# EAGLE board Qwiic GPS-RTK2 - ublox ZED-F9P-Panel (EAGLE 9.5.1), part 1 of 3
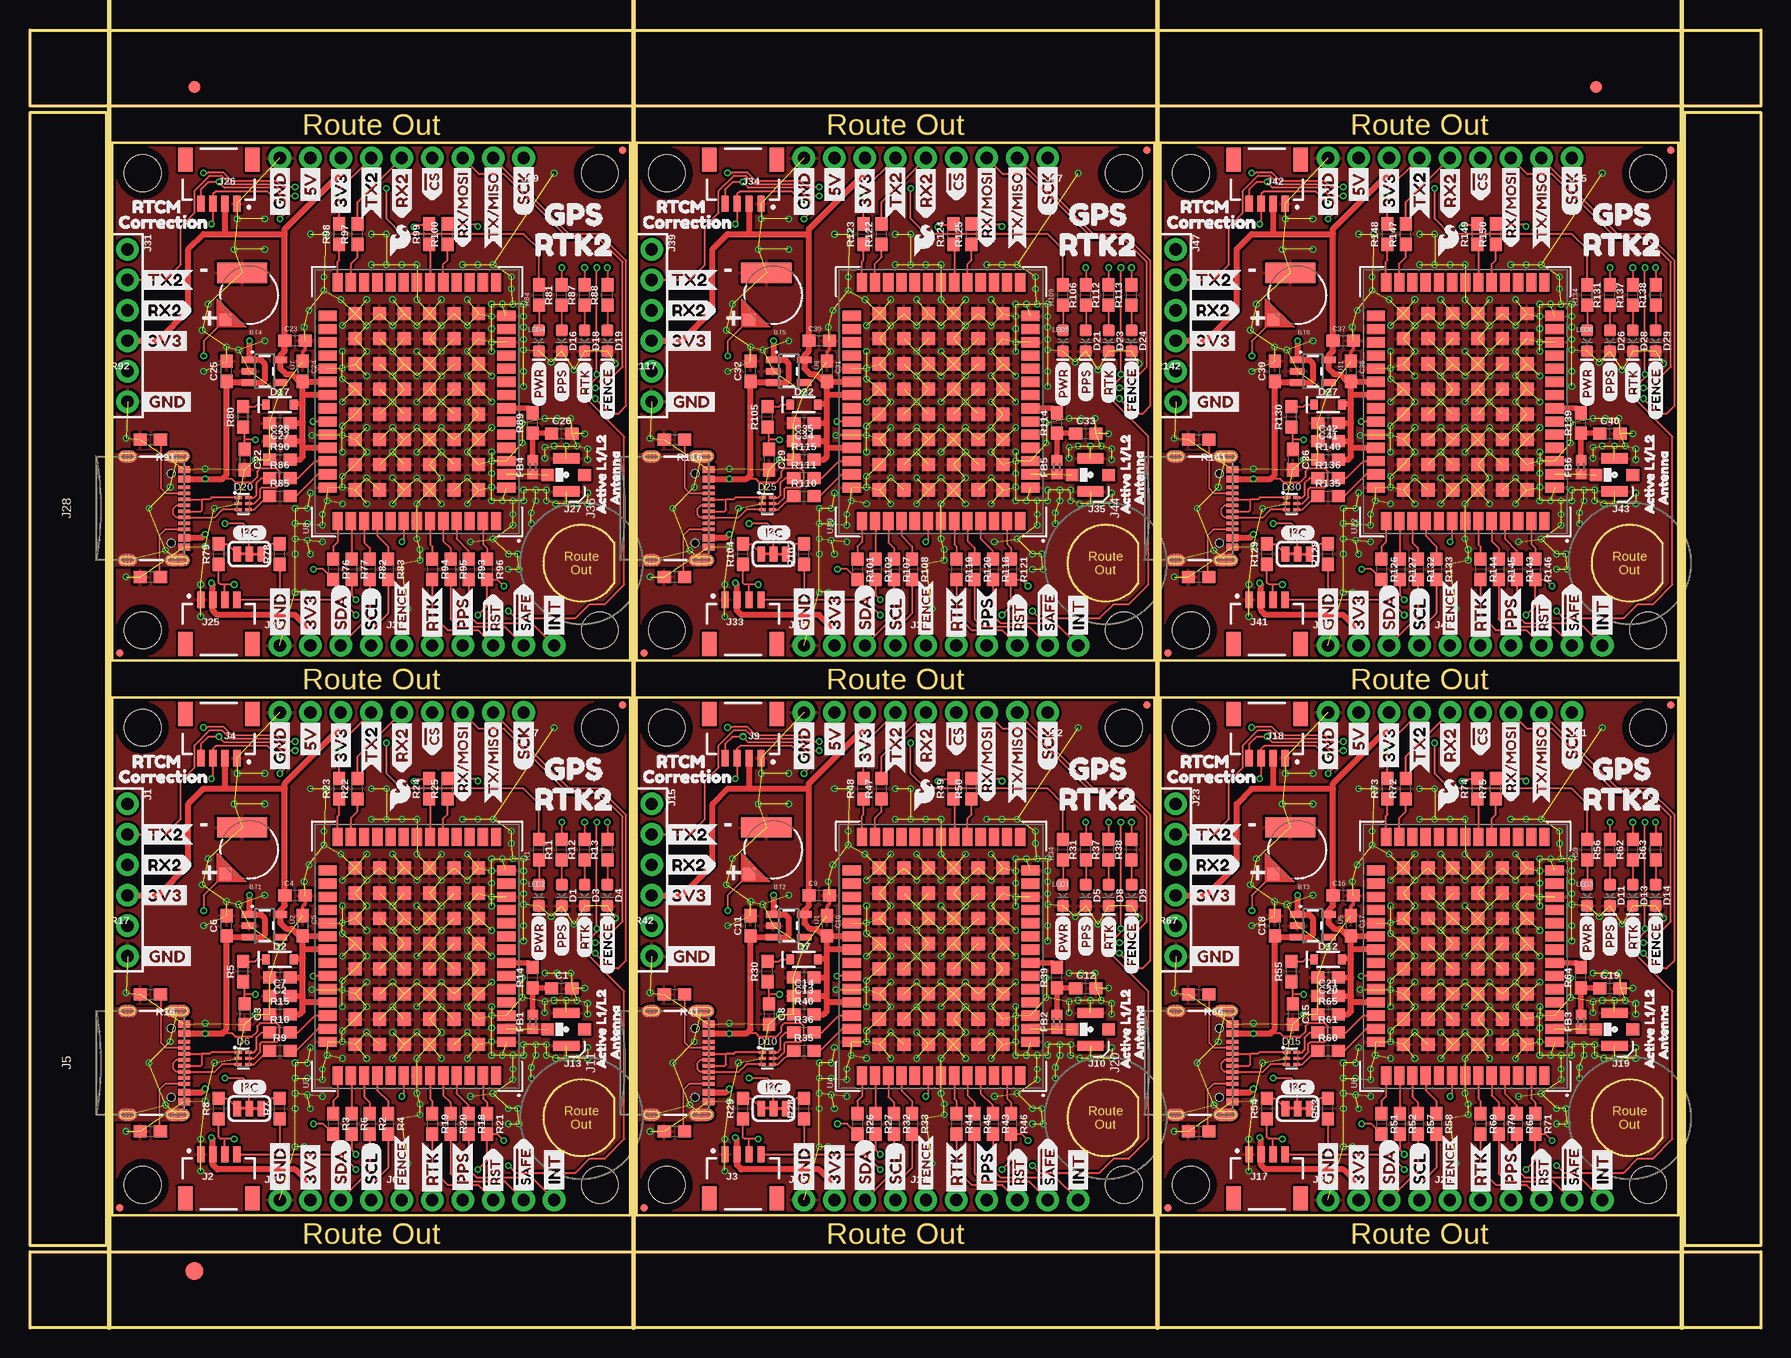
[diagram p0: board, top side]
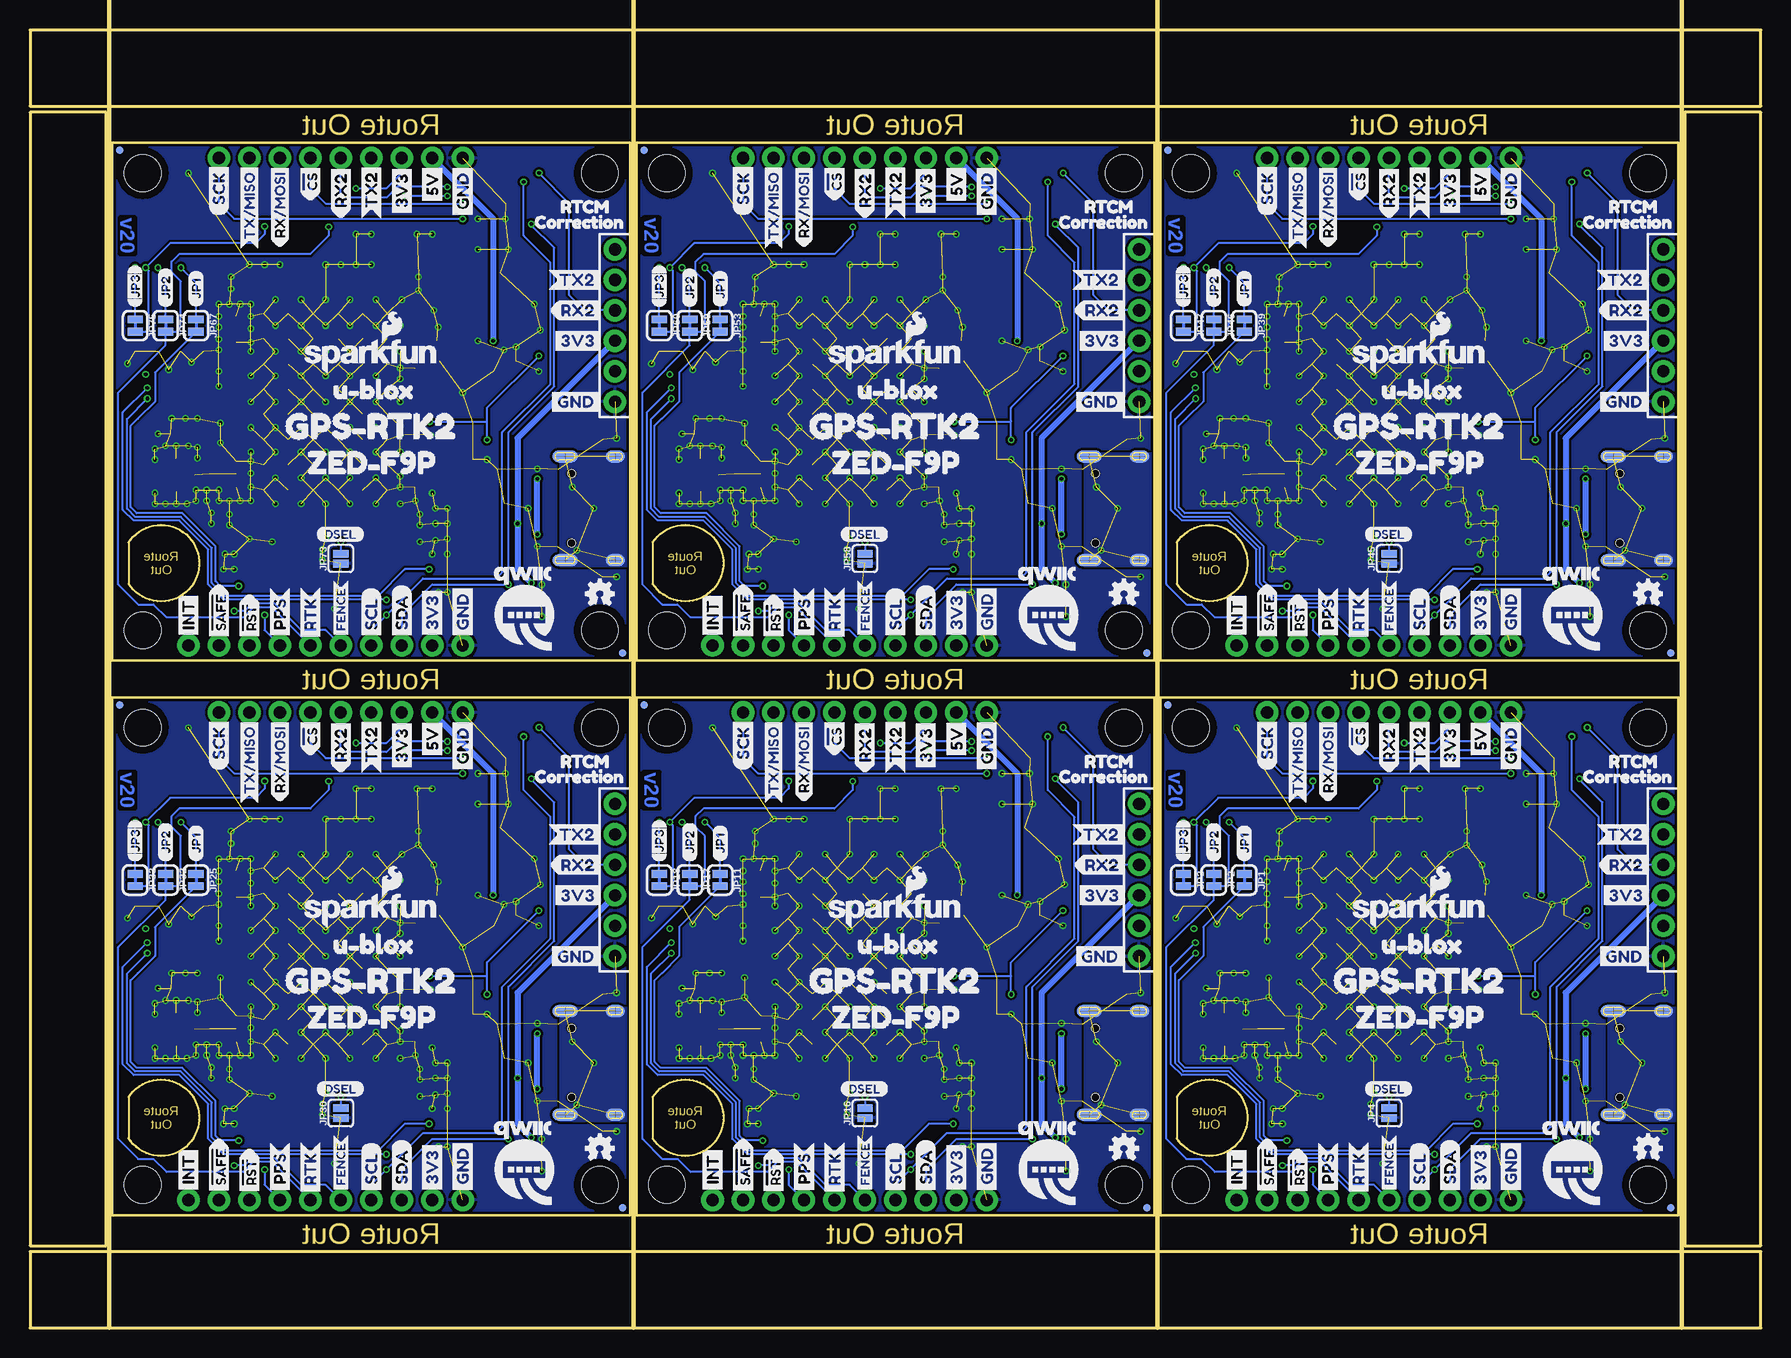
[diagram p1: board, bottom side, seen from below]

Size 144.27 x 108.2 mm. Coordinates in mm from the lower left corner, seen from the top.
Outline: 50.04,9.4 6.86,9.4 6.86,52.58 50.04,52.58 50.04,9.4
Outline: 93.73,9.4 50.55,9.4 50.55,52.58 93.73,52.58 93.73,9.4
Outline: 137.41,9.4 94.23,9.4 94.23,52.58 137.41,52.58 137.41,9.4
Outline: 50.04,55.63 6.86,55.63 6.86,98.81 50.04,98.81 50.04,55.63
Outline: 93.73,55.63 50.55,55.63 50.55,98.81 93.73,98.81 93.73,55.63
Outline: 137.41,55.63 94.23,55.63 94.23,98.81 137.41,98.81 137.41,55.63
Outline: 0,6.35 144.27,6.35 144.27,0 0,0 0,6.35
Outline: 137.92,101.35 144.27,101.35 144.27,6.86 137.92,6.86 137.92,101.35
Outline: 0,108.2 144.27,108.2 144.27,101.85 0,101.85 0,108.2
Outline: 0,101.35 6.35,101.35 6.35,6.86 0,6.86 0,101.35
Copper layers (1*16): Top 0.035mm / dielectric 1.5mm / Bottom 0.035mm
Design rules "SparkFun-2-layer-FAB-LIMIT": minimum track width 4mil, minimum drill 6mil, track to track 4mil, track to pad 4mil, pad to pad 4mil, via to via 4mil, smd to smd 4mil, copper to edge 4mil, drill to drill 4mil, minimum pad ring 5mil, minimum via ring 5mil, stop-mask expansion 4mil, vias tented up to drill 25mil, thermal gap 10mil
Net classes: 2 3.3V: width 0.508 mm
tRestrict: area 44.2,24.1 to 45.6,25.7; area 87.9,24.1 to 89.3,25.7; area 131.6,24.1 to 133,25.7; area 44.2,70.4 to 45.6,71.9; area 87.9,70.4 to 89.3,71.9; area 131.6,70.4 to 133,71.9
Milling: 4 lines

## Footprints (pad centres in the part's own frame; a part is rotated, then mirrored left to right if it is on the bottom)
ML414H_IV01E = smd 1 x 1: + 2.022,2.032 | smd 4.2 x 1.7: - 0.6,-1.85
0603 = smd 1.1 x 1: 1 -0.85,0; 2 0.85,0
LED-0603 = smd 1 x 1: A -0.877,0; C 0.877,0
SOD-323 = smd 0.63 x 0.83: A 1.15,0; C -1.15,0
SOT886 = smd 0.61 x 0.25: 1 -0.405,0.5 | smd 0.56 x 0.25: 2 -0.43,0; 3 -0.43,-0.5; 4 0.43,-0.5; 5 0.43,0; 6 0.43,0.5
FIDUCIAL-1X2 = smd 1 x 1: 1 0,0
FIDUCIAL-1.5X3 = smd 1.5 x 1.5: 1 0,0
0402 = smd 0.85 x 0.9: 1 -0.58,0; 2 0.58,0
1X06_NO_SILK = drill 1.016 pad 1.88: 1 0,0; 2 2.54,0; 3 5.08,0; 4 7.62,0; 5 10.16,0; 6 12.7,0
JST04_1MM_RA = smd 0.6 x 1.35: 1 -1.5,0; 2 -0.5,0; 3 0.5,0; 4 1.5,0 | smd 1.2 x 2: NC1 2.8,-3.675; NC2 -2.8,-3.675
USB-C-16P = smd 0.3 x 1: A5 -1.25,-0.34; A6 -0.25,-0.34; A7 0.25,-0.34; A8 1.25,-0.34; B5 1.75,-0.34; B6 0.75,-0.34; B7 -0.75,-0.34; B8 -1.75,-0.34 | smd 0.6 x 1: GND -3.225,-0.34; GND2 3.225,-0.34; VBUS1 -2.45,-0.34; VBUS2 2.45,-0.34 | smd 1 x 2.1: SHLD1 -4.32,-0.915; SHLD2 4.32,-0.915 | smd 1 x 2.1 bottom: SHLD3 -4.32,-0.915; SHLD4 4.32,-0.915 | smd 1 x 1.6: SHLD5 -4.32,-5.095; SHLD8 4.32,-5.095 | smd 1 x 1.6 bottom: SHLD6 -4.32,-5.095; SHLD7 4.32,-5.095 | hole 0.65: -2.89,-1.445; 2.89,-1.445
1X09_NO_SILK = drill 1.016 pad 1.88: 1 0,0; 2 2.54,0; 3 5.08,0; 4 7.62,0; 5 10.16,0; 6 12.7,0; 7 15.24,0; 8 17.78,0; 9 20.32,0
1X04_NO_SILK = drill 1.016 pad 1.88: 1 0,0; 2 2.54,0; 3 5.08,0; 4 7.62,0
U.FL = smd 2.2 x 0.85: 1 0,1.375; 2 0,-1.375 | smd 1.05 x 1: FEED 1.525,0; NC -1.525,0
SMT-JUMPER_2_NC_TRACE_SILK = smd 0.635 x 1.27: 1 -0.508,0; 2 0.508,0
SMT-JUMPER_2_NO_SILK = smd 0.635 x 1.27: 1 -0.406,0; 2 0.406,0
SMT-JUMPER_3_2-NC_TRACE_SILK = smd 0.635 x 1.27: 1 -1.016,0; 2 0,0; 3 1.016,0
STAND-OFF-TIGHT = hole 3.048: 0,0
FIDUCIAL-MICRO = smd 0.635 x 0.635: 1 0,0
SOT23-5 = smd 0.55 x 1.2: 1 -0.95,-1.3; 2 0,-1.3; 3 0.95,-1.3; 4 0.95,1.3; 5 -0.95,1.3
ZED-F9P = smd 0.85 x 1.52: 1 -7.15,-7.45; 2 -6.05,-7.45; 3 -4.95,-7.45; 4 -3.85,-7.45; 5 -2.75,-7.45; 6 -1.65,-7.45; 7 -0.55,-7.45; 8 0.55,-7.45; 9 1.65,-7.45; 10 2.75,-7.45; 11 3.85,-7.45; 12 4.95,-7.45; 13 6.05,-7.45; 14 7.15,-7.45; 28 7.15,7.45; 29 6.05,7.45; 30 4.95,7.45; 31 3.85,7.45; 32 2.75,7.45; 33 1.65,7.45; 34 0.55,7.45; 35 -0.55,7.45; 36 -1.65,7.45; 37 -2.75,7.45; 38 -3.85,7.45; 39 -4.95,7.45; 40 -6.05,7.45; 41 -7.15,7.45 | smd 1.52 x 0.85: 15 9.95,-6.6; 16 9.95,-5.5; 17 9.95,-4.4; 18 9.95,-3.3; 19 9.95,-2.2; 20 9.95,-1.1; 21 9.95,0; 22 9.95,1.1; 23 9.95,2.2; 24 9.95,3.3; 25 9.95,4.4; 26 9.95,5.5; 27 9.95,6.6; 42 -9.95,6.6; 43 -9.95,5.5; 44 -9.95,4.4; 45 -9.95,3.3; 46 -9.95,2.2; 47 -9.95,1.1; 48 -9.95,0; 49 -9.95,-1.1; 50 -9.95,-2.2; 51 -9.95,-3.3; 52 -9.95,-4.4; 53 -9.95,-5.5; 54 -9.95,-6.6 | smd 1.1 x 1.1: 55 -1.05,-1.05; 56 -3.15,-1.05; 57 -5.25,-1.05; 58 -7.35,-1.05; 59 -1.05,-3.1; 60 -3.15,-3.1; 61 -5.25,-3.1; 62 -7.35,-3.1; 63 -1.05,-5.15; 64 -3.15,-5.15; 65 -5.25,-5.15; 66 -7.35,-5.15; 67 -1.05,5.15; 68 -3.15,5.15; 69 -5.25,5.15; 70 -7.35,5.15; 71 -1.05,3.1; 72 -3.15,3.1; 73 -5.25,3.1; 74 -7.35,3.1; 75 -1.05,1.05; 76 -3.15,1.05; 77 -5.25,1.05; 78 -7.35,1.05; 79 1.05,1.05; 80 3.15,1.05; 81 5.25,1.05; 82 7.35,1.05; 83 1.05,3.1; 84 3.15,3.1; 85 5.25,3.1; 86 7.35,3.1; 87 1.05,5.15; 88 3.15,5.15; 89 5.25,5.15; 90 7.35,5.15; 91 1.05,-5.15; 92 3.15,-5.15; 93 5.25,-5.15; 94 7.35,-5.15; 95 1.05,-3.1; 96 3.15,-3.1; 97 5.25,-3.1; 98 7.35,-3.1; 99 1.05,-1.05; 100 3.15,-1.05; 101 5.25,-1.05; 102 7.35,-1.05

## Placement (x,y rotation side)
BT1  ML414H_IV01E_BATTERY  [ML414H_IV01E]  18.29,39.88 180 top
BT2  ML414H_IV01E_BATTERY  [ML414H_IV01E]  61.98,39.88 180 top
BT3  ML414H_IV01E_BATTERY  [ML414H_IV01E]  105.66,39.88 180 top
BT4  ML414H_IV01E_BATTERY  [ML414H_IV01E]  18.29,86.11 180 top
BT5  ML414H_IV01E_BATTERY  [ML414H_IV01E]  61.98,86.11 180 top
BT6  ML414H_IV01E_BATTERY  [ML414H_IV01E]  105.66,86.11 180 top
C1  47pF  [0603]  44.32,28.32 0 top
C2  1.0uF  [0603]  20.83,29.21 180 top
C3  1.0uF  [0603]  17.91,26.16 270 top
C4  1.0uF  [0603]  22.1,36.07 0 top
C5  0.1uF  [0603]  22.73,33.53 270 top
C6  1.0uF  [0603]  16.38,33.53 90 top
C7  0.1uF  [0603]  20.83,27.69 0 top
C8  1.0uF  [0603]  61.59,26.16 270 top
C9  1.0uF  [0603]  65.79,36.07 0 top
C10  0.1uF  [0603]  66.42,33.53 270 top
C11  1.0uF  [0603]  60.07,33.53 90 top
C12  47pF  [0603]  88.01,28.32 0 top
C13  1.0uF  [0603]  64.52,29.21 180 top
C14  0.1uF  [0603]  64.52,27.69 0 top
C15  1.0uF  [0603]  105.28,26.16 270 top
C16  1.0uF  [0603]  109.47,36.07 0 top
C17  0.1uF  [0603]  110.11,33.53 270 top
C18  1.0uF  [0603]  103.76,33.53 90 top
C19  47pF  [0603]  131.7,28.32 0 top
C20  1.0uF  [0603]  108.2,29.21 180 top
C21  0.1uF  [0603]  108.2,27.69 0 top
C22  1.0uF  [0603]  17.91,72.39 270 top
C23  1.0uF  [0603]  22.1,82.3 0 top
C24  0.1uF  [0603]  22.73,79.76 270 top
C25  1.0uF  [0603]  16.38,79.76 90 top
C26  47pF  [0603]  44.32,74.55 0 top
C27  1.0uF  [0603]  20.83,75.44 180 top
C28  0.1uF  [0603]  20.83,73.91 0 top
C29  1.0uF  [0603]  61.59,72.39 270 top
C30  1.0uF  [0603]  65.79,82.3 0 top
C31  0.1uF  [0603]  66.42,79.76 270 top
C32  1.0uF  [0603]  60.07,79.76 90 top
C33  47pF  [0603]  88.01,74.55 0 top
C34  1.0uF  [0603]  64.52,75.44 180 top
C35  0.1uF  [0603]  64.52,73.91 0 top
C36  1.0uF  [0603]  105.28,72.39 270 top
C37  1.0uF  [0603]  109.47,82.3 0 top
C38  0.1uF  [0603]  110.11,79.76 270 top
C39  1.0uF  [0603]  103.76,79.76 90 top
C40  47pF  [0603]  131.7,74.55 0 top
C41  1.0uF  [0603]  108.2,75.44 180 top
C42  0.1uF  [0603]  108.2,73.91 0 top
D1  Yellow  [LED-0603]  44.32,36.07 270 top
D2  0.5A/40V/420mV  [SOD-323]  20.83,30.73 0 top
D3  GREEN  [LED-0603]  46.23,36.07 270 top
D4  BLUE  [LED-0603]  48.13,36.07 270 top
D5  Yellow  [LED-0603]  88.01,36.07 270 top
D6  PRTR5V0U2F  [SOT886]  17.78,22.48 0 top
D7  0.5A/40V/420mV  [SOD-323]  64.52,30.73 0 top
D8  GREEN  [LED-0603]  89.92,36.07 270 top
D9  BLUE  [LED-0603]  91.82,36.07 270 top
D10  PRTR5V0U2F  [SOT886]  61.47,22.48 0 top
D11  Yellow  [LED-0603]  131.7,36.07 270 top
D12  0.5A/40V/420mV  [SOD-323]  108.2,30.73 0 top
D13  GREEN  [LED-0603]  133.6,36.07 270 top
D14  BLUE  [LED-0603]  135.51,36.07 270 top
D15  PRTR5V0U2F  [SOT886]  105.16,22.48 0 top
D16  Yellow  [LED-0603]  44.32,82.3 270 top
D17  0.5A/40V/420mV  [SOD-323]  20.83,76.96 0 top
D18  GREEN  [LED-0603]  46.23,82.3 270 top
D19  BLUE  [LED-0603]  48.13,82.3 270 top
D20  PRTR5V0U2F  [SOT886]  17.78,68.71 0 top
D21  Yellow  [LED-0603]  88.01,82.3 270 top
D22  0.5A/40V/420mV  [SOD-323]  64.52,76.96 0 top
D23  GREEN  [LED-0603]  89.92,82.3 270 top
D24  BLUE  [LED-0603]  91.82,82.3 270 top
D25  PRTR5V0U2F  [SOT886]  61.47,68.71 0 top
D26  Yellow  [LED-0603]  131.7,82.3 270 top
D27  0.5A/40V/420mV  [SOD-323]  108.2,76.96 0 top
D28  GREEN  [LED-0603]  133.6,82.3 270 top
D29  BLUE  [LED-0603]  135.51,82.3 270 top
D30  PRTR5V0U2F  [SOT886]  105.16,68.71 0 top
E$1  [FIDUCIAL-1X2]  13.72,103.44 0 top
E$2  [FIDUCIAL-1X2]  130.56,103.44 0 top
E$3  [FIDUCIAL-1.5X3]  13.72,4.76 0 top
FB1  FERRITE_BEAD-120_OHM-0402  [0402]  41.91,25.53 90 top
FB2  FERRITE_BEAD-120_OHM-0402  [0402]  85.6,25.53 90 top
FB3  FERRITE_BEAD-120_OHM-0402  [0402]  129.29,25.53 90 top
FB4  FERRITE_BEAD-120_OHM-0402  [0402]  41.91,71.75 90 top
FB5  FERRITE_BEAD-120_OHM-0402  [0402]  85.6,71.75 90 top
FB6  FERRITE_BEAD-120_OHM-0402  [0402]  129.29,71.75 90 top
J1  Radio  [1X06_NO_SILK]  8.13,43.69 270 top
J2  Qwiic Right Angle  [JST04_1MM_RA]  15.75,14.48 0 top
J3  Qwiic Right Angle  [JST04_1MM_RA]  59.44,14.48 0 top
J4  Qwiic Right Angle  [JST04_1MM_RA]  15.75,47.5 180 top
J5  [USB-C-16P]  13.21,22.1 270 top
J6  [1X06_NO_SILK]  30.99,10.67 0 top
J7  [1X09_NO_SILK]  41.15,51.31 180 top
J8  [1X04_NO_SILK]  20.83,10.67 0 top
J9  Qwiic Right Angle  [JST04_1MM_RA]  59.44,47.5 180 top
J10  U.FL  [U.FL]  88.39,24.89 180 top
J11  [USB-C-16P]  56.9,22.1 270 top
J12  [1X09_NO_SILK]  84.84,51.31 180 top
J13  U.FL  [U.FL]  44.7,24.89 180 top
J14  [1X06_NO_SILK]  74.68,10.67 0 top
J15  Radio  [1X06_NO_SILK]  51.82,43.69 270 top
J16  [1X04_NO_SILK]  64.52,10.67 0 top
J17  Qwiic Right Angle  [JST04_1MM_RA]  103.12,14.48 0 top
J18  Qwiic Right Angle  [JST04_1MM_RA]  103.12,47.5 180 top
J19  U.FL  [U.FL]  132.08,24.89 180 top
J20  [USB-C-16P]  100.58,22.1 270 top
J21  [1X09_NO_SILK]  128.52,51.31 180 top
J22  [1X06_NO_SILK]  118.36,10.67 0 top
J23  Radio  [1X06_NO_SILK]  95.5,43.69 270 top
J24  [1X04_NO_SILK]  108.2,10.67 0 top
J25  Qwiic Right Angle  [JST04_1MM_RA]  15.75,60.71 0 top
J26  Qwiic Right Angle  [JST04_1MM_RA]  15.75,93.73 180 top
J27  U.FL  [U.FL]  44.7,71.12 180 top
J28  [USB-C-16P]  13.21,68.33 270 top
J29  [1X09_NO_SILK]  41.15,97.54 180 top
J30  [1X06_NO_SILK]  30.99,56.9 0 top
J31  Radio  [1X06_NO_SILK]  8.13,89.92 270 top
J32  [1X04_NO_SILK]  20.83,56.9 0 top
J33  Qwiic Right Angle  [JST04_1MM_RA]  59.44,60.71 0 top
J34  Qwiic Right Angle  [JST04_1MM_RA]  59.44,93.73 180 top
J35  U.FL  [U.FL]  88.39,71.12 180 top
J36  [USB-C-16P]  56.9,68.33 270 top
J37  [1X09_NO_SILK]  84.84,97.54 180 top
J38  [1X06_NO_SILK]  74.68,56.9 0 top
J39  Radio  [1X06_NO_SILK]  51.82,89.92 270 top
J40  [1X04_NO_SILK]  64.52,56.9 0 top
J41  Qwiic Right Angle  [JST04_1MM_RA]  103.12,60.71 0 top
J42  Qwiic Right Angle  [JST04_1MM_RA]  103.12,93.73 180 top
J43  U.FL  [U.FL]  132.08,71.12 180 top
J44  [USB-C-16P]  100.58,68.33 270 top
J45  [1X09_NO_SILK]  128.52,97.54 180 top
J46  [1X06_NO_SILK]  118.36,56.9 0 top
J47  Radio  [1X06_NO_SILK]  95.5,89.92 270 top
J48  [1X04_NO_SILK]  108.2,56.9 0 top
JP1  JUMPER-SMT_2_NC_TRACE_SILK  [SMT-JUMPER_2_NC_TRACE_SILK]  43.05,37.34 270 bottom
JP2  JUMPER-SMT_2_NC_TRACE_SILK  [SMT-JUMPER_2_NC_TRACE_SILK]  45.59,37.34 270 bottom
JP3  JUMPER-SMT_2_NC_TRACE_SILK  [SMT-JUMPER_2_NC_TRACE_SILK]  48.13,37.34 270 bottom
JP4  JUMPER-SMT_2_NO_SILK  [SMT-JUMPER_2_NO_SILK]  30.99,17.91 90 bottom
JP5  JUMPER-SMT_3_2-NC_TRACE_SILK  [SMT-JUMPER_3_2-NC_TRACE_SILK]  18.29,18.29 0 top
JP6  STAND-OFFTIGHT  [STAND-OFF-TIGHT]  53.09,11.94 90 top
JP7  STAND-OFFTIGHT  [STAND-OFF-TIGHT]  53.09,50.04 90 top
JP8  FIDUCIALUFIDUCIAL  [FIDUCIAL-MICRO]  93.09,51.94 90 top
JP9  FIDUCIALUFIDUCIAL  [FIDUCIAL-MICRO]  51.18,10.03 90 top
JP10  JUMPER-SMT_3_2-NC_TRACE_SILK  [SMT-JUMPER_3_2-NC_TRACE_SILK]  61.98,18.29 0 top
JP11  JUMPER-SMT_2_NC_TRACE_SILK  [SMT-JUMPER_2_NC_TRACE_SILK]  86.74,37.34 270 bottom
JP12  FIDUCIALUFIDUCIAL  [FIDUCIAL-MICRO]  93.09,51.94 270 bottom
JP13  FIDUCIALUFIDUCIAL  [FIDUCIAL-MICRO]  51.18,10.03 270 bottom
JP14  STAND-OFFTIGHT  [STAND-OFF-TIGHT]  91.19,11.94 90 top
JP15  STAND-OFFTIGHT  [STAND-OFF-TIGHT]  91.19,50.04 90 top
JP16  JUMPER-SMT_2_NO_SILK  [SMT-JUMPER_2_NO_SILK]  74.68,17.91 90 bottom
JP17  JUMPER-SMT_2_NC_TRACE_SILK  [SMT-JUMPER_2_NC_TRACE_SILK]  89.28,37.34 270 bottom
JP18  JUMPER-SMT_2_NC_TRACE_SILK  [SMT-JUMPER_2_NC_TRACE_SILK]  91.82,37.34 270 bottom
JP19  STAND-OFFTIGHT  [STAND-OFF-TIGHT]  96.77,11.94 90 top
JP20  STAND-OFFTIGHT  [STAND-OFF-TIGHT]  96.77,50.04 90 top
JP21  FIDUCIALUFIDUCIAL  [FIDUCIAL-MICRO]  49.4,51.94 90 top
JP22  FIDUCIALUFIDUCIAL  [FIDUCIAL-MICRO]  136.78,51.94 90 top
JP23  FIDUCIALUFIDUCIAL  [FIDUCIAL-MICRO]  94.87,10.03 90 top
JP24  JUMPER-SMT_3_2-NC_TRACE_SILK  [SMT-JUMPER_3_2-NC_TRACE_SILK]  105.66,18.29 0 top
JP25  JUMPER-SMT_2_NC_TRACE_SILK  [SMT-JUMPER_2_NC_TRACE_SILK]  130.43,37.34 270 bottom
JP26  FIDUCIALUFIDUCIAL  [FIDUCIAL-MICRO]  136.78,51.94 270 bottom
JP27  FIDUCIALUFIDUCIAL  [FIDUCIAL-MICRO]  94.87,10.03 270 bottom
JP28  STAND-OFFTIGHT  [STAND-OFF-TIGHT]  134.87,11.94 90 top
JP29  STAND-OFFTIGHT  [STAND-OFF-TIGHT]  134.87,50.04 90 top
JP30  JUMPER-SMT_2_NO_SILK  [SMT-JUMPER_2_NO_SILK]  118.36,17.91 90 bottom
JP31  STAND-OFFTIGHT  [STAND-OFF-TIGHT]  9.4,11.94 90 top
JP32  JUMPER-SMT_2_NC_TRACE_SILK  [SMT-JUMPER_2_NC_TRACE_SILK]  132.97,37.34 270 bottom
JP33  JUMPER-SMT_2_NC_TRACE_SILK  [SMT-JUMPER_2_NC_TRACE_SILK]  135.51,37.34 270 bottom
JP34  STAND-OFFTIGHT  [STAND-OFF-TIGHT]  9.4,58.17 90 top
JP35  STAND-OFFTIGHT  [STAND-OFF-TIGHT]  9.4,96.27 90 top
JP36  FIDUCIALUFIDUCIAL  [FIDUCIAL-MICRO]  49.4,98.17 90 top
JP37  FIDUCIALUFIDUCIAL  [FIDUCIAL-MICRO]  7.49,56.26 90 top
JP38  JUMPER-SMT_3_2-NC_TRACE_SILK  [SMT-JUMPER_3_2-NC_TRACE_SILK]  18.29,64.52 0 top
JP39  JUMPER-SMT_2_NC_TRACE_SILK  [SMT-JUMPER_2_NC_TRACE_SILK]  43.05,83.57 270 bottom
JP40  FIDUCIALUFIDUCIAL  [FIDUCIAL-MICRO]  49.4,98.17 270 bottom
JP41  STAND-OFFTIGHT  [STAND-OFF-TIGHT]  9.4,50.04 90 top
JP42  FIDUCIALUFIDUCIAL  [FIDUCIAL-MICRO]  7.49,56.26 270 bottom
JP43  STAND-OFFTIGHT  [STAND-OFF-TIGHT]  47.5,58.17 90 top
JP44  STAND-OFFTIGHT  [STAND-OFF-TIGHT]  47.5,96.27 90 top
JP45  JUMPER-SMT_2_NO_SILK  [SMT-JUMPER_2_NO_SILK]  30.99,64.14 90 bottom
JP46  JUMPER-SMT_2_NC_TRACE_SILK  [SMT-JUMPER_2_NC_TRACE_SILK]  45.59,83.57 270 bottom
JP47  JUMPER-SMT_2_NC_TRACE_SILK  [SMT-JUMPER_2_NC_TRACE_SILK]  48.13,83.57 270 bottom
JP48  STAND-OFFTIGHT  [STAND-OFF-TIGHT]  53.09,58.17 90 top
JP49  STAND-OFFTIGHT  [STAND-OFF-TIGHT]  53.09,96.27 90 top
JP50  FIDUCIALUFIDUCIAL  [FIDUCIAL-MICRO]  93.09,98.17 90 top
JP51  FIDUCIALUFIDUCIAL  [FIDUCIAL-MICRO]  51.18,56.26 90 top
JP52  JUMPER-SMT_3_2-NC_TRACE_SILK  [SMT-JUMPER_3_2-NC_TRACE_SILK]  61.98,64.52 0 top
JP53  JUMPER-SMT_2_NC_TRACE_SILK  [SMT-JUMPER_2_NC_TRACE_SILK]  86.74,83.57 270 bottom
JP54  FIDUCIALUFIDUCIAL  [FIDUCIAL-MICRO]  93.09,98.17 270 bottom
JP55  FIDUCIALUFIDUCIAL  [FIDUCIAL-MICRO]  51.18,56.26 270 bottom
JP56  STAND-OFFTIGHT  [STAND-OFF-TIGHT]  91.19,58.17 90 top
JP57  STAND-OFFTIGHT  [STAND-OFF-TIGHT]  91.19,96.27 90 top
JP58  JUMPER-SMT_2_NO_SILK  [SMT-JUMPER_2_NO_SILK]  74.68,64.14 90 bottom
JP59  JUMPER-SMT_2_NC_TRACE_SILK  [SMT-JUMPER_2_NC_TRACE_SILK]  89.28,83.57 270 bottom
JP60  JUMPER-SMT_2_NC_TRACE_SILK  [SMT-JUMPER_2_NC_TRACE_SILK]  91.82,83.57 270 bottom
JP61  FIDUCIALUFIDUCIAL  [FIDUCIAL-MICRO]  7.49,10.03 90 top
JP62  STAND-OFFTIGHT  [STAND-OFF-TIGHT]  96.77,58.17 90 top
JP63  STAND-OFFTIGHT  [STAND-OFF-TIGHT]  96.77,96.27 90 top
JP64  FIDUCIALUFIDUCIAL  [FIDUCIAL-MICRO]  136.78,98.17 90 top
JP65  FIDUCIALUFIDUCIAL  [FIDUCIAL-MICRO]  94.87,56.26 90 top
JP66  JUMPER-SMT_3_2-NC_TRACE_SILK  [SMT-JUMPER_3_2-NC_TRACE_SILK]  105.66,64.52 0 top
JP67  JUMPER-SMT_2_NC_TRACE_SILK  [SMT-JUMPER_2_NC_TRACE_SILK]  130.43,83.57 270 bottom
JP68  FIDUCIALUFIDUCIAL  [FIDUCIAL-MICRO]  136.78,98.17 270 bottom
JP69  FIDUCIALUFIDUCIAL  [FIDUCIAL-MICRO]  94.87,56.26 270 bottom
JP70  STAND-OFFTIGHT  [STAND-OFF-TIGHT]  134.87,58.17 90 top
JP71  FIDUCIALUFIDUCIAL  [FIDUCIAL-MICRO]  49.4,51.94 270 bottom
JP72  STAND-OFFTIGHT  [STAND-OFF-TIGHT]  134.87,96.27 90 top
JP73  JUMPER-SMT_2_NO_SILK  [SMT-JUMPER_2_NO_SILK]  118.36,64.14 90 bottom
JP74  JUMPER-SMT_2_NC_TRACE_SILK  [SMT-JUMPER_2_NC_TRACE_SILK]  132.97,83.57 270 bottom
JP75  JUMPER-SMT_2_NC_TRACE_SILK  [SMT-JUMPER_2_NC_TRACE_SILK]  135.51,83.57 270 bottom
JP81  FIDUCIALUFIDUCIAL  [FIDUCIAL-MICRO]  7.49,10.03 270 bottom
JP91  STAND-OFFTIGHT  [STAND-OFF-TIGHT]  47.5,11.94 90 top
JP101  STAND-OFFTIGHT  [STAND-OFF-TIGHT]  47.5,50.04 90 top
LED1  RED  [LED-0603]  86.11,36.07 270 top
LED2  RED  [LED-0603]  42.42,36.07 270 top
LED3  RED  [LED-0603]  129.79,36.07 270 top
LED4  RED  [LED-0603]  42.42,82.3 270 top
LED5  RED  [LED-0603]  86.11,82.3 270 top
LED6  RED  [LED-0603]  129.79,82.3 270 top
LOGO1  OSHW-LOGOMINI  [OSHW-LOGO-MINI]  9.4,14.99 0 bottom
LOGO2  SFE_LOGO_NAME_FLAME.1_INCH  [SFE_LOGO_NAME_FLAME_.1]  28.45,34.8 0 bottom
LOGO3  OSHW-LOGOMINI  [OSHW-LOGO-MINI]  53.09,14.99 0 bottom
LOGO4  SFE_LOGO_NAME_FLAME.1_INCH  [SFE_LOGO_NAME_FLAME_.1]  72.14,34.8 0 bottom
LOGO5  OSHW-LOGOMINI  [OSHW-LOGO-MINI]  96.77,14.99 0 bottom
LOGO6  SFE_LOGO_NAME_FLAME.1_INCH  [SFE_LOGO_NAME_FLAME_.1]  115.82,34.8 0 bottom
LOGO7  OSHW-LOGOMINI  [OSHW-LOGO-MINI]  9.4,61.21 0 bottom
LOGO8  SFE_LOGO_NAME_FLAME.1_INCH  [SFE_LOGO_NAME_FLAME_.1]  28.45,81.03 0 bottom
LOGO9  OSHW-LOGOMINI  [OSHW-LOGO-MINI]  53.09,61.21 0 bottom
LOGO10  SFE_LOGO_NAME_FLAME.1_INCH  [SFE_LOGO_NAME_FLAME_.1]  72.14,81.03 0 bottom
LOGO11  OSHW-LOGOMINI  [OSHW-LOGO-MINI]  96.77,61.21 0 bottom
LOGO12  SFE_LOGO_NAME_FLAME.1_INCH  [SFE_LOGO_NAME_FLAME_.1]  115.82,81.03 0 bottom
R1  1k  [0603]  42.42,39.88 90 top
R2  33  [0603]  28.32,17.02 270 top
R3  33  [0603]  25.27,17.02 270 top
R4  33  [0603]  29.84,17.02 270 top
R5  1k  [0603]  17.78,29.72 90 top
R6  33  [0603]  26.8,17.02 270 top
R7  2.2k  [0603]  20.83,18.29 90 top
R8  2.2k  [0603]  15.75,18.29 90 top
R9  27  [0603]  20.83,23.11 0 top
R10  27  [0603]  20.83,24.64 0 top
R11  1k  [0603]  44.32,39.88 90 top
R12  1k  [0603]  46.23,39.88 90 top
R13  1k  [0603]  48.13,39.88 90 top
R14  10  [0603]  41.91,29.21 90 top
R15  100k  [0603]  20.83,26.16 0 top
R16  5.1k  [0603]  10.03,16.38 0 top
R17  5.1k  [0603]  10.03,27.81 0 top
R18  33  [0603]  36.58,17.02 270 top
R19  33  [0603]  33.53,17.02 270 top
R20  33  [0603]  35.05,17.02 270 top
R21  33  [0603]  38.1,17.02 270 top
R22  33  [0603]  27.3,44.96 90 top
R23  33  [0603]  25.78,44.96 90 top
R24  33  [0603]  33.27,44.96 90 top
R25  33  [0603]  34.8,44.96 90 top
R26  33  [0603]  68.96,17.02 270 top
R27  33  [0603]  70.48,17.02 270 top
R28  2.2k  [0603]  64.52,18.29 90 top
R29  2.2k  [0603]  59.44,18.29 90 top
R30  1k  [0603]  61.47,29.72 90 top
R31  1k  [0603]  88.01,39.88 90 top
R32  33  [0603]  72.01,17.02 270 top
R33  33  [0603]  73.53,17.02 270 top
R34  1k  [0603]  86.11,39.88 90 top
R35  27  [0603]  64.52,23.11 0 top
R36  27  [0603]  64.52,24.64 0 top
R37  1k  [0603]  89.92,39.88 90 top
R38  1k  [0603]  91.82,39.88 90 top
R39  10  [0603]  85.6,29.21 90 top
R40  100k  [0603]  64.52,26.16 0 top
R41  5.1k  [0603]  53.72,16.38 0 top
R42  5.1k  [0603]  53.72,27.81 0 top
R43  33  [0603]  80.26,17.02 270 top
R44  33  [0603]  77.22,17.02 270 top
R45  33  [0603]  78.74,17.02 270 top
R46  33  [0603]  81.79,17.02 270 top
R47  33  [0603]  70.99,44.96 90 top
R48  33  [0603]  69.47,44.96 90 top
R49  33  [0603]  76.96,44.96 90 top
R50  33  [0603]  78.49,44.96 90 top
R51  33  [0603]  112.65,17.02 270 top
R52  33  [0603]  114.17,17.02 270 top
R53  2.2k  [0603]  108.2,18.29 90 top
R54  2.2k  [0603]  103.12,18.29 90 top
R55  1k  [0603]  105.16,29.72 90 top
R56  1k  [0603]  131.7,39.88 90 top
R57  33  [0603]  115.7,17.02 270 top
R58  33  [0603]  117.22,17.02 270 top
R59  1k  [0603]  129.79,39.88 90 top
R60  27  [0603]  108.2,23.11 0 top
R61  27  [0603]  108.2,24.64 0 top
R62  1k  [0603]  133.6,39.88 90 top
R63  1k  [0603]  135.51,39.88 90 top
R64  10  [0603]  129.29,29.21 90 top
R65  100k  [0603]  108.2,26.16 0 top
R66  5.1k  [0603]  97.41,16.38 0 top
R67  5.1k  [0603]  97.41,27.81 0 top
R68  33  [0603]  123.95,17.02 270 top
R69  33  [0603]  120.9,17.02 270 top
R70  33  [0603]  122.43,17.02 270 top
R71  33  [0603]  125.48,17.02 270 top
R72  33  [0603]  114.68,44.96 90 top
R73  33  [0603]  113.16,44.96 90 top
R74  33  [0603]  120.65,44.96 90 top
R75  33  [0603]  122.17,44.96 90 top
R76  33  [0603]  25.27,63.25 270 top
R77  33  [0603]  26.8,63.25 270 top
R78  2.2k  [0603]  20.83,64.52 90 top
R79  2.2k  [0603]  15.75,64.52 90 top
R80  1k  [0603]  17.78,75.95 90 top
R81  1k  [0603]  44.32,86.11 90 top
R82  33  [0603]  28.32,63.25 270 top
R83  33  [0603]  29.84,63.25 270 top
R84  1k  [0603]  42.42,86.11 90 top
R85  27  [0603]  20.83,69.34 0 top
R86  27  [0603]  20.83,70.87 0 top
R87  1k  [0603]  46.23,86.11 90 top
R88  1k  [0603]  48.13,86.11 90 top
R89  10  [0603]  41.91,75.44 90 top
R90  100k  [0603]  20.83,72.39 0 top
R91  5.1k  [0603]  10.03,62.61 0 top
R92  5.1k  [0603]  10.03,74.04 0 top
R93  33  [0603]  36.58,63.25 270 top
R94  33  [0603]  33.53,63.25 270 top
R95  33  [0603]  35.05,63.25 270 top
R96  33  [0603]  38.1,63.25 270 top
R97  33  [0603]  27.3,91.19 90 top
R98  33  [0603]  25.78,91.19 90 top
R99  33  [0603]  33.27,91.19 90 top
R100  33  [0603]  34.8,91.19 90 top
R101  33  [0603]  68.96,63.25 270 top
R102  33  [0603]  70.48,63.25 270 top
R103  2.2k  [0603]  64.52,64.52 90 top
R104  2.2k  [0603]  59.44,64.52 90 top
R105  1k  [0603]  61.47,75.95 90 top
R106  1k  [0603]  88.01,86.11 90 top
R107  33  [0603]  72.01,63.25 270 top
R108  33  [0603]  73.53,63.25 270 top
R109  1k  [0603]  86.11,86.11 90 top
R110  27  [0603]  64.52,69.34 0 top
R111  27  [0603]  64.52,70.87 0 top
R112  1k  [0603]  89.92,86.11 90 top
R113  1k  [0603]  91.82,86.11 90 top
R114  10  [0603]  85.6,75.44 90 top
R115  100k  [0603]  64.52,72.39 0 top
R116  5.1k  [0603]  53.72,62.61 0 top
R117  5.1k  [0603]  53.72,74.04 0 top
R118  33  [0603]  80.26,63.25 270 top
R119  33  [0603]  77.22,63.25 270 top
R120  33  [0603]  78.74,63.25 270 top
R121  33  [0603]  81.79,63.25 270 top
R122  33  [0603]  70.99,91.19 90 top
R123  33  [0603]  69.47,91.19 90 top
R124  33  [0603]  76.96,91.19 90 top
R125  33  [0603]  78.49,91.19 90 top
R126  33  [0603]  112.65,63.25 270 top
R127  33  [0603]  114.17,63.25 270 top
R128  2.2k  [0603]  108.2,64.52 90 top
R129  2.2k  [0603]  103.12,64.52 90 top
R130  1k  [0603]  105.16,75.95 90 top
R131  1k  [0603]  131.7,86.11 90 top
R132  33  [0603]  115.7,63.25 270 top
R133  33  [0603]  117.22,63.25 270 top
R134  1k  [0603]  129.79,86.11 90 top
R135  27  [0603]  108.2,69.34 0 top
R136  27  [0603]  108.2,70.87 0 top
R137  1k  [0603]  133.6,86.11 90 top
R138  1k  [0603]  135.51,86.11 90 top
R139  10  [0603]  129.29,75.44 90 top
R140  100k  [0603]  108.2,72.39 0 top
R141  5.1k  [0603]  97.41,62.61 0 top
R142  5.1k  [0603]  97.41,74.04 0 top
R143  33  [0603]  123.95,63.25 270 top
R144  33  [0603]  120.9,63.25 270 top
R145  33  [0603]  122.43,63.25 270 top
R146  33  [0603]  125.48,63.25 270 top
R147  33  [0603]  114.68,91.19 90 top
R148  33  [0603]  113.16,91.19 90 top
R149  33  [0603]  120.65,91.19 90 top
R150  33  [0603]  122.17,91.19 90 top
U1  3.3V  [SOT23-5]  63.25,33.53 270 top
U2  3.3V  [SOT23-5]  19.56,33.53 270 top
U3  ZED-F9P  [ZED-F9P]  32.26,30.99 90 top
U4  ZED-F9P  [ZED-F9P]  75.95,30.99 90 top
U5  3.3V  [SOT23-5]  106.93,33.53 270 top
U6  ZED-F9P  [ZED-F9P]  119.63,30.99 90 top
U7  3.3V  [SOT23-5]  19.56,79.76 270 top
U8  ZED-F9P  [ZED-F9P]  32.26,77.22 90 top
U9  3.3V  [SOT23-5]  63.25,79.76 270 top
U10  ZED-F9P  [ZED-F9P]  75.95,77.22 90 top
U11  3.3V  [SOT23-5]  106.93,79.76 270 top
U12  ZED-F9P  [ZED-F9P]  119.63,77.22 90 top
U$1  [SDA-[)]  25.91,11.05 90 top
U$2  [SDA-[)]  69.6,11.05 90 top
U$3  [SCL-[)]  28.45,11.05 90 top
U$4  [SDA-[)]  25.91,11.05 90 bottom
U$5  [SCL-[)]  28.45,11.05 90 bottom
U$6  [3V3-04]  23.37,11.05 90 top
U$7  [3V3-04]  23.37,11.05 90 bottom
U$8  [GND-04]  20.83,11.05 90 top
U$9  [GND-04]  20.83,11.05 90 bottom
U$10  [I_SUPER2_C-()-03]  16.89,20.07 0 top
U$11  [FENCE2]  48.13,29.46 90 top
U$12  [JP20]  45.59,38.86 90 bottom
U$13  [RTK1]  46.23,30.86 90 top
U$14  [FENCE0]  30.99,11.18 90 top
U$15  [INT8]  43.69,11.05 90 top
U$16  [INT8]  43.69,11.05 90 bottom
U$17  [FENCE0]  30.99,11.18 90 bottom
U$18  [PWR-()-03]  42.42,30.61 90 top
U$19  [5V]  23.37,47.24 90 top
U$20  [5V]  23.37,47.24 90 bottom
U$21  [RX20]  30.99,46.23 90 top
U$22  [U#BLOX3]  33.02,32 0 bottom
U$23  [CS#-<]]  33.53,47.5 90 top
U$24  [CS#-<]]  33.53,47.5 90 bottom
U$25  [JP10]  43.05,38.86 90 bottom
U$26  [RX#MOSI3]  36.07,43.81 90 top
U$27  [DSEL0]  33.02,19.94 0 bottom
U$28  [RTK1]  33.53,10.92 90 bottom
U$29  [RTK1]  33.53,10.92 90 top
U$30  [QWIIC-LOGO-MEDIUM]  15.75,13.72 0 bottom
U$31  [RX#MOSI3]  36.07,43.81 90 bottom
U$32  [JP32]  48.13,38.86 90 bottom
U$33  [SFE_LOGO_FLAME_.1]  30.86,44.45 0 top
U$34  [TX#MISO1]  38.61,43.69 90 top
U$35  [#RST3]  38.61,10.79 90 top
U$36  [#RST3]  38.61,10.79 90 bottom
U$37  [TX#MISO1]  38.61,43.69 90 bottom
U$38  [SCK-(]-04]  41.15,46.48 90 top
U$39  [#SAFE1]  41.15,10.79 90 top
U$40  [#SAFE1]  41.15,10.79 90 bottom
U$41  [SCK-(]-04]  41.15,46.48 90 bottom
U$42  [RX22]  8.89,38.61 0 top
U$43  [PPS5]  36.07,11.05 90 top
U$44  [PPS5]  36.07,11.05 90 bottom
U$45  [GND3]  9.02,30.99 0 top
U$46  [GPS#RTK28]  37.46,28.96 0 bottom
U$47  [SCL-[)]  72.14,11.05 90 top
U$48  [RTCM5]  13.59,47.24 0 bottom
U$49  [ZED#F9P6]  35.31,25.91 0 bottom
U$50  [TX21]  28.45,46.23 90 top
U$51  [TX23]  8.89,41.15 0 top
U$52  [PPS0]  44.32,30.99 90 top
U$53  [CORRECTION0]  15.75,45.97 0 bottom
U$54  SMA-ANTENNA-THREADED  [SMA-THREADED]  45.97,17.53 0 top
U$55  [TX21]  28.45,46.23 90 bottom
U$56  [RX20]  30.99,46.23 90 bottom
U$57  [TX21]  13.72,41.15 0 bottom
U$58  [RX20]  13.59,38.61 0 bottom
U$59  [GPS0]  41.27,46.61 0 top
U$60  [3V3-04]  25.91,46.23 90 bottom
U$61  [3V3-04]  25.91,46.23 90 top
U$62  [GND-04]  20.83,46.1 90 bottom
U$63  [GND-04]  20.83,46.1 90 top
U$64  [RTK21]  40.13,44.07 0 top
U$65  [ACTIVE_L1#L21]  47.62,20.95 90 top
U$66  [3V3-04]  8.89,36.07 0 top
U$67  [3V3-04]  13.59,36.07 0 bottom
U$68  [GND3]  13.84,30.99 0 bottom
U$69  [CORRECTION0]  6.48,45.97 0 top
U$70  [RTCM5]  7.62,47.24 0 top
U$71  [ANTENNA2]  48.77,21.72 90 top
U$72  [SDA-[)]  69.6,11.05 90 bottom
U$73  [SCL-[)]  72.14,11.05 90 bottom
U$74  [3V3-04]  67.06,11.05 90 top
U$75  [3V3-04]  67.06,11.05 90 bottom
U$76  [GND-04]  64.52,11.05 90 top
U$77  [GND-04]  64.52,11.05 90 bottom
U$78  [I_SUPER2_C-()-03]  60.58,20.07 0 top
U$79  [INT8]  87.38,11.05 90 top
U$80  [INT8]  87.38,11.05 90 bottom
U$81  [U#BLOX3]  76.71,32 0 bottom
U$82  [QWIIC-LOGO-MEDIUM]  59.44,13.72 0 bottom
U$83  [#RST3]  82.3,10.79 90 top
U$84  [#RST3]  82.3,10.79 90 bottom
U$85  [#SAFE1]  84.84,10.79 90 top
U$86  [#SAFE1]  84.84,10.79 90 bottom
U$87  [PPS5]  79.76,11.05 90 top
U$88  [PPS5]  79.76,11.05 90 bottom
U$89  [PPS0]  88.01,30.99 90 top
U$90  [FENCE2]  91.82,29.46 90 top
U$91  [JP20]  89.28,38.86 90 bottom
U$92  [RTK1]  89.92,30.86 90 top
U$93  [FENCE0]  74.68,11.18 90 top
U$94  [FENCE0]  74.68,11.18 90 bottom
U$95  [RTK1]  77.22,10.92 90 bottom
U$96  [RTK1]  77.22,10.92 90 top
U$97  [3V3-04]  69.6,46.23 90 bottom
U$98  [3V3-04]  69.6,46.23 90 top
U$99  [GND-04]  64.52,46.1 90 bottom
U$100  [GND-04]  64.52,46.1 90 top
U$101  [JP10]  86.74,38.86 90 bottom
U$102  [JP32]  91.82,38.86 90 bottom
U$103  [DSEL0]  76.71,19.94 0 bottom
U$104  [PWR-()-03]  86.11,30.61 90 top
U$105  [5V]  67.06,47.24 90 top
U$106  [5V]  67.06,47.24 90 bottom
U$107  [CS#-<]]  77.22,47.5 90 top
U$108  [CS#-<]]  77.22,47.5 90 bottom
U$109  [SCK-(]-04]  84.84,46.48 90 top
U$110  [SCK-(]-04]  84.84,46.48 90 bottom
U$111  [SFE_LOGO_FLAME_.1]  74.55,44.45 0 top
U$112  [RX#MOSI3]  79.76,43.81 90 bottom
U$113  [TX#MISO1]  82.3,43.69 90 bottom
U$114  [GND3]  52.7,30.99 0 top
U$115  [GPS#RTK28]  81.15,28.96 0 bottom
U$116  [3V3-04]  52.58,36.07 0 top
U$117  [3V3-04]  57.28,36.07 0 bottom
U$118  [GND3]  57.53,30.99 0 bottom
U$119  [CORRECTION0]  50.16,45.97 0 top
U$120  [RTCM5]  51.31,47.24 0 top
U$121  [ZED#F9P6]  78.99,25.91 0 bottom
U$122  [RTCM5]  57.28,47.24 0 bottom
U$123  [CORRECTION0]  59.44,45.97 0 bottom
U$124  [RX#MOSI3]  79.76,43.81 90 top
U$125  [TX#MISO1]  82.3,43.69 90 top
U$126  SMA-ANTENNA-THREADED  [SMA-THREADED]  89.66,17.53 0 top
U$127  [ACTIVE_L1#L21]  91.31,20.95 90 top
U$128  [ANTENNA2]  92.46,21.72 90 top
U$129  [RX20]  74.68,46.23 90 top
U$130  [RX22]  52.58,38.61 0 top
U$131  [TX21]  72.14,46.23 90 top
U$132  [TX23]  52.58,41.15 0 top
U$133  [TX21]  72.14,46.23 90 bottom
U$134  [RX20]  74.68,46.23 90 bottom
U$135  [TX21]  57.4,41.15 0 bottom
U$136  [RX20]  57.28,38.61 0 bottom
U$137  [GPS0]  84.96,46.61 0 top
U$138  [RTK21]  83.82,44.07 0 top
U$139  [SDA-[)]  113.28,11.05 90 top
U$140  [SCL-[)]  115.82,11.05 90 top
U$141  [SDA-[)]  113.28,11.05 90 bottom
U$142  [SCL-[)]  115.82,11.05 90 bottom
U$143  [3V3-04]  110.74,11.05 90 top
U$144  [3V3-04]  110.74,11.05 90 bottom
U$145  [GND-04]  108.2,11.05 90 top
U$146  [GND-04]  108.2,11.05 90 bottom
U$147  [I_SUPER2_C-()-03]  104.27,20.07 0 top
U$148  [INT8]  131.06,11.05 90 top
U$149  [INT8]  131.06,11.05 90 bottom
U$150  [U#BLOX3]  120.4,32 0 bottom
U$151  [QWIIC-LOGO-MEDIUM]  103.12,13.72 0 bottom
U$152  [#RST3]  125.98,10.79 90 top
U$153  [#RST3]  125.98,10.79 90 bottom
U$154  [#SAFE1]  128.52,10.79 90 top
U$155  [#SAFE1]  128.52,10.79 90 bottom
U$156  [PPS5]  123.44,11.05 90 top
U$157  [PPS5]  123.44,11.05 90 bottom
U$158  [PPS0]  131.7,30.99 90 top
U$159  [FENCE2]  135.51,29.46 90 top
U$160  [JP20]  132.97,38.86 90 bottom
U$161  [RTK1]  133.6,30.86 90 top
U$162  [FENCE0]  118.36,11.18 90 top
U$163  [FENCE0]  118.36,11.18 90 bottom
U$164  [RTK1]  120.9,10.92 90 bottom
U$165  [RTK1]  120.9,10.92 90 top
U$166  [3V3-04]  113.28,46.23 90 bottom
U$167  [3V3-04]  113.28,46.23 90 top
U$168  [GND-04]  108.2,46.1 90 bottom
U$169  [GND-04]  108.2,46.1 90 top
U$170  [JP10]  130.43,38.86 90 bottom
U$171  [JP32]  135.51,38.86 90 bottom
U$172  [DSEL0]  120.4,19.94 0 bottom
U$173  [PWR-()-03]  129.79,30.61 90 top
U$174  [5V]  110.74,47.24 90 top
U$175  [5V]  110.74,47.24 90 bottom
U$176  [CS#-<]]  120.9,47.5 90 top
U$177  [CS#-<]]  120.9,47.5 90 bottom
U$178  [SCK-(]-04]  128.52,46.48 90 top
U$179  [SCK-(]-04]  128.52,46.48 90 bottom
U$180  [SFE_LOGO_FLAME_.1]  118.24,44.45 0 top
U$181  [RX#MOSI3]  123.44,43.81 90 bottom
U$182  [TX#MISO1]  125.98,43.69 90 bottom
U$183  [GND3]  96.39,30.99 0 top
U$184  [GPS#RTK28]  124.84,28.96 0 bottom
U$185  [3V3-04]  96.27,36.07 0 top
U$186  [3V3-04]  100.97,36.07 0 bottom
U$187  [GND3]  101.22,30.99 0 bottom
U$188  [CORRECTION0]  93.85,45.97 0 top
U$189  [RTCM5]  95,47.24 0 top
U$190  [ZED#F9P6]  122.68,25.91 0 bottom
U$191  [RTCM5]  100.97,47.24 0 bottom
U$192  [CORRECTION0]  103.12,45.97 0 bottom
U$193  [RX#MOSI3]  123.44,43.81 90 top
U$194  [TX#MISO1]  125.98,43.69 90 top
U$195  SMA-ANTENNA-THREADED  [SMA-THREADED]  133.35,17.53 0 top
U$196  [ACTIVE_L1#L21]  135,20.95 90 top
U$197  [ANTENNA2]  136.14,21.72 90 top
U$198  [RX20]  118.36,46.23 90 top
U$199  [RX22]  96.27,38.61 0 top
U$200  [TX21]  115.82,46.23 90 top
U$201  [TX23]  96.27,41.15 0 top
U$202  [TX21]  115.82,46.23 90 bottom
U$203  [RX20]  118.36,46.23 90 bottom
U$204  [TX21]  101.09,41.15 0 bottom
U$205  [RX20]  100.97,38.61 0 bottom
U$206  [GPS0]  128.65,46.61 0 top
U$207  [RTK21]  127.51,44.07 0 top
U$208  [SDA-[)]  25.91,57.28 90 top
U$209  [SCL-[)]  28.45,57.28 90 top
U$210  [SDA-[)]  25.91,57.28 90 bottom
U$211  [SCL-[)]  28.45,57.28 90 bottom
U$212  [3V3-04]  23.37,57.28 90 top
U$213  [3V3-04]  23.37,57.28 90 bottom
U$214  [GND-04]  20.83,57.28 90 top
U$215  [GND-04]  20.83,57.28 90 bottom
U$216  [I_SUPER2_C-()-03]  16.89,66.29 0 top
U$217  [INT8]  43.69,57.28 90 top
U$218  [INT8]  43.69,57.28 90 bottom
U$219  [U#BLOX3]  33.02,78.23 0 bottom
U$220  [QWIIC-LOGO-MEDIUM]  15.75,59.94 0 bottom
U$221  [#RST3]  38.61,57.02 90 top
U$222  [#RST3]  38.61,57.02 90 bottom
U$223  [#SAFE1]  41.15,57.02 90 top
U$224  [#SAFE1]  41.15,57.02 90 bottom
U$225  [PPS5]  36.07,57.28 90 top
U$226  [PPS5]  36.07,57.28 90 bottom
U$227  [PPS0]  44.32,77.22 90 top
U$228  [FENCE2]  48.13,75.69 90 top
U$229  [JP20]  45.59,85.09 90 bottom
U$230  [RTK1]  46.23,77.09 90 top
U$231  [FENCE0]  30.99,57.4 90 top
U$232  [FENCE0]  30.99,57.4 90 bottom
U$233  [RTK1]  33.53,57.15 90 bottom
U$234  [RTK1]  33.53,57.15 90 top
U$235  [3V3-04]  25.91,92.46 90 bottom
U$236  [3V3-04]  25.91,92.46 90 top
U$237  [GND-04]  20.83,92.33 90 bottom
U$238  [GND-04]  20.83,92.33 90 top
U$239  [JP10]  43.05,85.09 90 bottom
U$240  [JP32]  48.13,85.09 90 bottom
U$241  [DSEL0]  33.02,66.17 0 bottom
U$242  [PWR-()-03]  42.42,76.83 90 top
U$243  [5V]  23.37,93.47 90 top
U$244  [5V]  23.37,93.47 90 bottom
U$245  [CS#-<]]  33.53,93.73 90 top
U$246  [CS#-<]]  33.53,93.73 90 bottom
U$247  [SCK-(]-04]  41.15,92.71 90 top
U$248  [SCK-(]-04]  41.15,92.71 90 bottom
U$249  [SFE_LOGO_FLAME_.1]  30.86,90.68 0 top
U$250  [RX#MOSI3]  36.07,90.04 90 bottom
U$251  [TX#MISO1]  38.61,89.92 90 bottom
U$252  [GND3]  9.02,77.22 0 top
U$253  [GPS#RTK28]  37.46,75.18 0 bottom
U$254  [3V3-04]  8.89,82.3 0 top
U$255  [3V3-04]  13.59,82.3 0 bottom
U$256  [GND3]  13.84,77.22 0 bottom
U$257  [CORRECTION0]  6.48,92.2 0 top
U$258  [RTCM5]  7.62,93.47 0 top
U$259  [ZED#F9P6]  35.31,72.14 0 bottom
U$260  [RTCM5]  13.59,93.47 0 bottom
U$261  [CORRECTION0]  15.75,92.2 0 bottom
U$262  [RX#MOSI3]  36.07,90.04 90 top
U$263  [TX#MISO1]  38.61,89.92 90 top
U$264  SMA-ANTENNA-THREADED  [SMA-THREADED]  45.97,63.75 0 top
U$265  [ACTIVE_L1#L21]  47.62,67.18 90 top
U$266  [ANTENNA2]  48.77,67.94 90 top
U$267  [RX20]  30.99,92.46 90 top
U$268  [RX22]  8.89,84.84 0 top
U$269  [TX21]  28.45,92.46 90 top
U$270  [TX23]  8.89,87.38 0 top
U$271  [TX21]  28.45,92.46 90 bottom
U$272  [RX20]  30.99,92.46 90 bottom
U$273  [TX21]  13.72,87.38 0 bottom
U$274  [RX20]  13.59,84.84 0 bottom
U$275  [GPS0]  41.27,92.84 0 top
U$276  [RTK21]  40.13,90.3 0 top
U$277  [SDA-[)]  69.6,57.28 90 top
U$278  [SCL-[)]  72.14,57.28 90 top
U$279  [SDA-[)]  69.6,57.28 90 bottom
U$280  [SCL-[)]  72.14,57.28 90 bottom
U$281  [3V3-04]  67.06,57.28 90 top
U$282  [3V3-04]  67.06,57.28 90 bottom
U$283  [GND-04]  64.52,57.28 90 top
U$284  [GND-04]  64.52,57.28 90 bottom
U$285  [I_SUPER2_C-()-03]  60.58,66.29 0 top
U$286  [INT8]  87.38,57.28 90 top
U$287  [INT8]  87.38,57.28 90 bottom
U$288  [U#BLOX3]  76.71,78.23 0 bottom
U$289  [QWIIC-LOGO-MEDIUM]  59.44,59.94 0 bottom
U$290  [#RST3]  82.3,57.02 90 top
U$291  [#RST3]  82.3,57.02 90 bottom
U$292  [#SAFE1]  84.84,57.02 90 top
U$293  [#SAFE1]  84.84,57.02 90 bottom
U$294  [PPS5]  79.76,57.28 90 top
U$295  [PPS5]  79.76,57.28 90 bottom
U$296  [PPS0]  88.01,77.22 90 top
U$297  [FENCE2]  91.82,75.69 90 top
U$298  [JP20]  89.28,85.09 90 bottom
U$299  [RTK1]  89.92,77.09 90 top
U$300  [FENCE0]  74.68,57.4 90 top
U$301  [FENCE0]  74.68,57.4 90 bottom
U$302  [RTK1]  77.22,57.15 90 bottom
U$303  [RTK1]  77.22,57.15 90 top
U$304  [3V3-04]  69.6,92.46 90 bottom
U$305  [3V3-04]  69.6,92.46 90 top
U$306  [GND-04]  64.52,92.33 90 bottom
U$307  [GND-04]  64.52,92.33 90 top
U$308  [JP10]  86.74,85.09 90 bottom
U$309  [JP32]  91.82,85.09 90 bottom
U$310  [DSEL0]  76.71,66.17 0 bottom
U$311  [PWR-()-03]  86.11,76.83 90 top
U$312  [5V]  67.06,93.47 90 top
U$313  [5V]  67.06,93.47 90 bottom
U$314  [CS#-<]]  77.22,93.73 90 top
U$315  [CS#-<]]  77.22,93.73 90 bottom
U$316  [SCK-(]-04]  84.84,92.71 90 top
U$317  [SCK-(]-04]  84.84,92.71 90 bottom
U$318  [SFE_LOGO_FLAME_.1]  74.55,90.68 0 top
U$319  [RX#MOSI3]  79.76,90.04 90 bottom
U$320  [TX#MISO1]  82.3,89.92 90 bottom
U$321  [GND3]  52.7,77.22 0 top
U$322  [GPS#RTK28]  81.15,75.18 0 bottom
U$323  [3V3-04]  52.58,82.3 0 top
U$324  [3V3-04]  57.28,82.3 0 bottom
U$325  [GND3]  57.53,77.22 0 bottom
U$326  [CORRECTION0]  50.16,92.2 0 top
U$327  [RTCM5]  51.31,93.47 0 top
U$328  [ZED#F9P6]  78.99,72.14 0 bottom
U$329  [RTCM5]  57.28,93.47 0 bottom
U$330  [CORRECTION0]  59.44,92.2 0 bottom
U$331  [RX#MOSI3]  79.76,90.04 90 top
U$332  [TX#MISO1]  82.3,89.92 90 top
U$333  SMA-ANTENNA-THREADED  [SMA-THREADED]  89.66,63.75 0 top
U$334  [ACTIVE_L1#L21]  91.31,67.18 90 top
U$335  [ANTENNA2]  92.46,67.94 90 top
U$336  [RX20]  74.68,92.46 90 top
U$337  [RX22]  52.58,84.84 0 top
U$338  [TX21]  72.14,92.46 90 top
U$339  [TX23]  52.58,87.38 0 top
U$340  [TX21]  72.14,92.46 90 bottom
U$341  [RX20]  74.68,92.46 90 bottom
U$342  [TX21]  57.4,87.38 0 bottom
U$343  [RX20]  57.28,84.84 0 bottom
U$344  [GPS0]  84.96,92.84 0 top
U$345  [RTK21]  83.82,90.3 0 top
U$346  [SDA-[)]  113.28,57.28 90 top
U$347  [SCL-[)]  115.82,57.28 90 top
U$348  [SDA-[)]  113.28,57.28 90 bottom
U$349  [SCL-[)]  115.82,57.28 90 bottom
U$350  [3V3-04]  110.74,57.28 90 top
U$351  [3V3-04]  110.74,57.28 90 bottom
U$352  [GND-04]  108.2,57.28 90 top
U$353  [GND-04]  108.2,57.28 90 bottom
U$354  [I_SUPER2_C-()-03]  104.27,66.29 0 top
U$355  [INT8]  131.06,57.28 90 top
U$356  [INT8]  131.06,57.28 90 bottom
U$357  [U#BLOX3]  120.4,78.23 0 bottom
U$358  [QWIIC-LOGO-MEDIUM]  103.12,59.94 0 bottom
U$359  [#RST3]  125.98,57.02 90 top
U$360  [#RST3]  125.98,57.02 90 bottom
U$361  [#SAFE1]  128.52,57.02 90 top
U$362  [#SAFE1]  128.52,57.02 90 bottom
U$363  [PPS5]  123.44,57.28 90 top
U$364  [PPS5]  123.44,57.28 90 bottom
U$365  [PPS0]  131.7,77.22 90 top
U$366  [FENCE2]  135.51,75.69 90 top
U$367  [JP20]  132.97,85.09 90 bottom
U$368  [RTK1]  133.6,77.09 90 top
U$369  [FENCE0]  118.36,57.4 90 top
U$370  [FENCE0]  118.36,57.4 90 bottom
U$371  [RTK1]  120.9,57.15 90 bottom
U$372  [RTK1]  120.9,57.15 90 top
U$373  [3V3-04]  113.28,92.46 90 bottom
U$374  [3V3-04]  113.28,92.46 90 top
U$375  [GND-04]  108.2,92.33 90 bottom
U$376  [GND-04]  108.2,92.33 90 top
U$377  [JP10]  130.43,85.09 90 bottom
U$378  [JP32]  135.51,85.09 90 bottom
U$379  [DSEL0]  120.4,66.17 0 bottom
U$380  [PWR-()-03]  129.79,76.83 90 top
U$381  [5V]  110.74,93.47 90 top
U$382  [5V]  110.74,93.47 90 bottom
U$383  [CS#-<]]  120.9,93.73 90 top
U$384  [CS#-<]]  120.9,93.73 90 bottom
U$385  [SCK-(]-04]  128.52,92.71 90 top
U$386  [SCK-(]-04]  128.52,92.71 90 bottom
U$387  [SFE_LOGO_FLAME_.1]  118.24,90.68 0 top
U$388  [RX#MOSI3]  123.44,90.04 90 bottom
U$389  [TX#MISO1]  125.98,89.92 90 bottom
U$390  [GND3]  96.39,77.22 0 top
U$391  [GPS#RTK28]  124.84,75.18 0 bottom
U$392  [3V3-04]  96.27,82.3 0 top
U$393  [3V3-04]  100.97,82.3 0 bottom
U$394  [GND3]  101.22,77.22 0 bottom
U$395  [CORRECTION0]  93.85,92.2 0 top
U$396  [RTCM5]  95,93.47 0 top
U$397  [ZED#F9P6]  122.68,72.14 0 bottom
U$398  [RTCM5]  100.97,93.47 0 bottom
U$399  [CORRECTION0]  103.12,92.2 0 bottom
U$400  [RX#MOSI3]  123.44,90.04 90 top
U$401  [TX#MISO1]  125.98,89.92 90 top
U$402  SMA-ANTENNA-THREADED  [SMA-THREADED]  133.35,63.75 0 top
U$403  [ACTIVE_L1#L21]  135,67.18 90 top
U$404  [ANTENNA2]  136.14,67.94 90 top
U$405  [RX20]  118.36,92.46 90 top
U$406  [RX22]  96.27,84.84 0 top
U$407  [TX21]  115.82,92.46 90 top
U$408  [TX23]  96.27,87.38 0 top
U$409  [TX21]  115.82,92.46 90 bottom
U$410  [RX20]  118.36,92.46 90 bottom
U$411  [TX21]  101.09,87.38 0 bottom
U$412  [RX20]  100.97,84.84 0 bottom
U$413  [GPS0]  128.65,92.84 0 top
U$414  [RTK21]  127.51,90.3 0 top

## Library data of the parts
BT1-BT6 = SparkFun-Batteries; PROD_ID: BATT-14267
C1 C12 C19 C26 C33 C40 = SparkFun-Capacitors; PROD_ID: CAP-08913
C2-C4 C6 C8 C9 C11 C13 C15 C16 C18 C20 C22 C23 C25 C27 C29 C30 C32 C34 C36 C37 C39 C41 = SparkFun-Capacitors; PROD_ID: CAP-00868
C5 C7 C10 C14 C17 C21 C24 C28 C31 C35 C38 C42 = SparkFun-Capacitors; PROD_ID: CAP-00810
D1 D5 D11 D16 D21 D26 = SparkFun-LED; PROD_ID: DIO-09003
D2 D7 D12 D17 D22 D27 = SparkFun-DiscreteSemi; PROD_ID: DIO-10955
D3 D8 D13 D18 D23 D28 = SparkFun-LED; PROD_ID: DIO-00821
D4 D9 D14 D19 D24 D29 = SparkFun-LED; PROD_ID: DIO-08575
D6 D10 D15 D20 D25 D30 = SparkFun-IC-Power; PROD_ID: DIO-14084
E$1 E$2 JP8 JP9 JP12 JP13 JP21-JP23 JP26 JP27 JP36 JP37 JP40 JP42 JP50 JP51 JP54 JP55 JP61 JP64 JP65 JP68 JP69 JP71 JP81 LOGO1-LOGO12 U$33 U$111 U$180 U$249 U$318 U$387 = SparkFun-Aesthetics
E$3 = SparkFun-Retired
FB1-FB6 = SparkFun-Coils; MFG_PART: BLM15HB121SN1D; PROD_ID: NDUC-14206
J1 J7 J12 J15 J21 J23 J29 J31 J37 J39 J45 J47 = SparkFun-Connectors
J2-J4 J9 J17 J18 J25 J26 J33 J34 J41 J42 = SparkFun-Connectors; PROD_ID: CONN-13694
J5 J11 J20 J28 J36 J44 = SparkFun-Connectors; PROD_ID: CONN-14122
J6 J14 J22 J30 J38 J46 = SparkFun-Connectors; PROD_ID: CONN-08437
J8 J16 J24 J32 J40 J48 = SparkFun-Connectors; PROD_ID: CONN-09696
J10 J13 J19 J27 J35 J43 = SparkFun-Connectors; PROD_ID: CONN-09193; SF_ID: WRL-09144
JP1-JP5 JP10 JP11 JP16-JP18 JP24 JP25 JP30 JP32 JP33 JP38 JP39 JP45-JP47 JP52 JP53 JP58-JP60 JP66 JP67 JP73-JP75 = SparkFun-Jumpers
JP6 JP7 JP14 JP15 JP19 JP20 JP28 JP29 JP31 JP34 JP35 JP41 JP43 JP44 JP48 JP49 JP56 JP57 JP62 JP63 JP70 JP72 JP91 JP101 U$54 U$126 U$195 U$264 U$333 U$402 = SparkFun-Hardware
LED1-LED6 = SparkFun-LED; PROD_ID: DIO-00819
R1 R5 R11-R13 R30 R31 R34 R37 R38 R55 R56 R59 R62 R63 R80 R81 R84 R87 R88 R105 R106 R109 R112 R113 R130 R131 R134 R137 R138 = SparkFun-Resistors; PROD_ID: RES-07856
R2-R4 R6 R18-R27 R32 R33 R43-R52 R57 R58 R68-R77 R82 R83 R93-R102 R107 R108 R118-R127 R132 R133 R143-R150 = SparkFun-Resistors; PROD_ID: RES-08270
R7 R8 R28 R29 R53 R54 R78 R79 R103 R104 R128 R129 = SparkFun-Resistors; PROD_ID: RES-08272
R9 R10 R35 R36 R60 R61 R85 R86 R110 R111 R135 R136 = SparkFun-Resistors; PROD_ID: RES-09334
R14 R39 R64 R89 R114 R139 = SparkFun-Resistors; PROD_ID: RES-12581
R15 R40 R65 R90 R115 R140 = SparkFun-Resistors; PROD_ID: RES-07828
R16 R17 R41 R42 R66 R67 R91 R92 R116 R117 R141 R142 = SparkFun-Resistors; PROD_ID: RES-12083
U1 U2 U5 U7 U9 U11 = SparkFun-IC-Power; PROD_ID: VREG-12457
U3 U4 U6 U8 U10 U12 = SparkFun-GPS; PROD_ID: IC-14209
U$1-U$10 U$18-U$20 U$23 U$24 U$30 U$38 U$41 U$47 U$60-U$63 U$66 U$67 U$72-U$78 U$82 U$97-U$100 U$104-U$110 U$116 U$117 U$139-U$147 U$151 U$166-U$169 U$173-U$179 U$185 U$186 U$208-U$216 U$220 U$235-U$238 U$242-U$248 U$254 U$255 U$277-U$285 U$289 U$304-U$307 U$311-U$317 U$323 U$324 U$346-U$354 U$358 U$373-U$376 U$380-U$386 U$392 U$393 = Labels
U$11-U$13 U$90-U$92 U$159-U$161 U$228-U$230 U$297-U$299 U$366-U$368 = buzzard_labels
U$14 U$17 U$28 U$29 U$93-U$96 U$162-U$165 U$231-U$234 U$300-U$303 U$369-U$372 = buzzard_labels (1)
U$15 U$16 U$22 U$25 U$32 U$79-U$81 U$101 U$102 U$148-U$150 U$170 U$171 U$217-U$219 U$239 U$240 U$286-U$288 U$308 U$309 U$355-U$357 U$377 U$378 = buzzard_labels (5)
U$21 U$42 U$50 U$51 U$55-U$58 U$129-U$136 U$198-U$205 U$267-U$274 U$336-U$343 U$405-U$412 = buzzard_labels (10)
U$26 U$31 U$34 U$37 U$112 U$113 U$124 U$125 U$181 U$182 U$193 U$194 U$250 U$251 U$262 U$263 U$319 U$320 U$331 U$332 U$388 U$389 U$400 U$401 = buzzard_labels (36)
U$27 U$103 U$172 U$241 U$310 U$379 = buzzard_labels (6)
U$35 U$36 U$39 U$40 U$43 U$44 U$83-U$88 U$152-U$157 U$221-U$226 U$290-U$295 U$359-U$364 = buzzard_labels (7)
U$45 U$46 U$48 U$49 U$53 U$59 U$64 U$68-U$70 U$114 U$115 U$118-U$123 U$137 U$138 U$183 U$184 U$187-U$192 U$206 U$207 U$252 U$253 U$256-U$261 U$275 U$276 U$321 U$322 U$325-U$330 U$344 U$345 U$390 U$391 U$394-U$399 U$413 U$414 = buzzard_labels (4)
U$52 U$89 U$158 U$227 U$296 U$365 = buzzard_labels (33)
U$65 U$71 U$127 U$128 U$196 U$197 U$265 U$266 U$334 U$335 U$403 U$404 = buzzard_labels (8)